# EAGLE board ir (EAGLE 9.4.2)
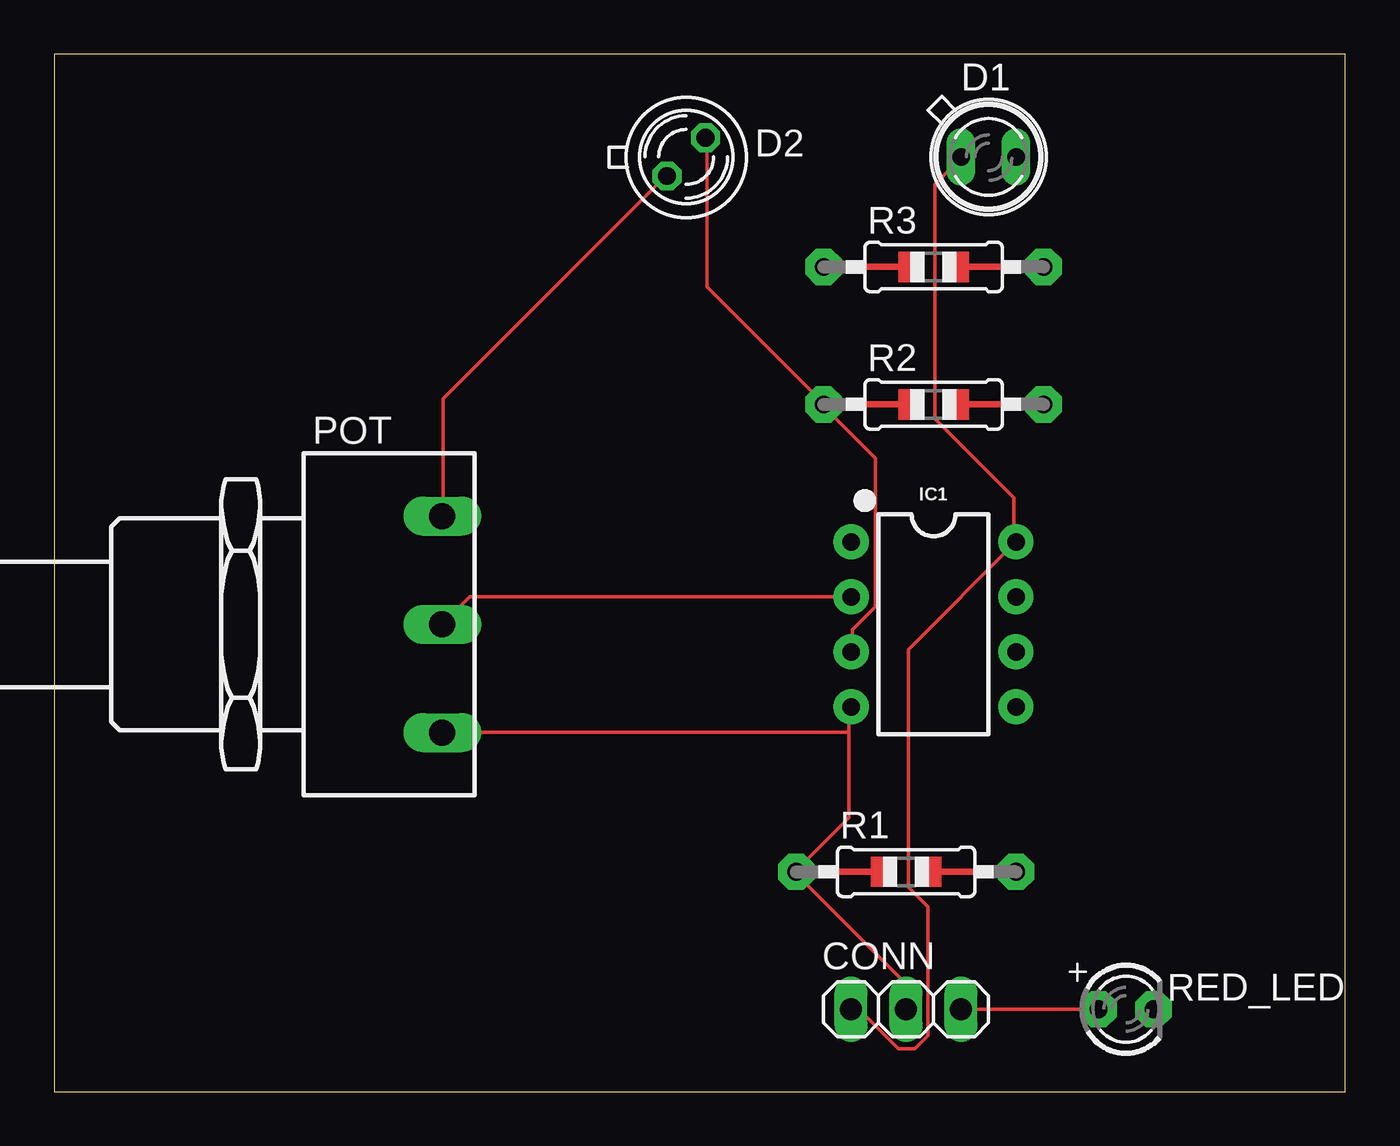
[diagram p0: board, top side]
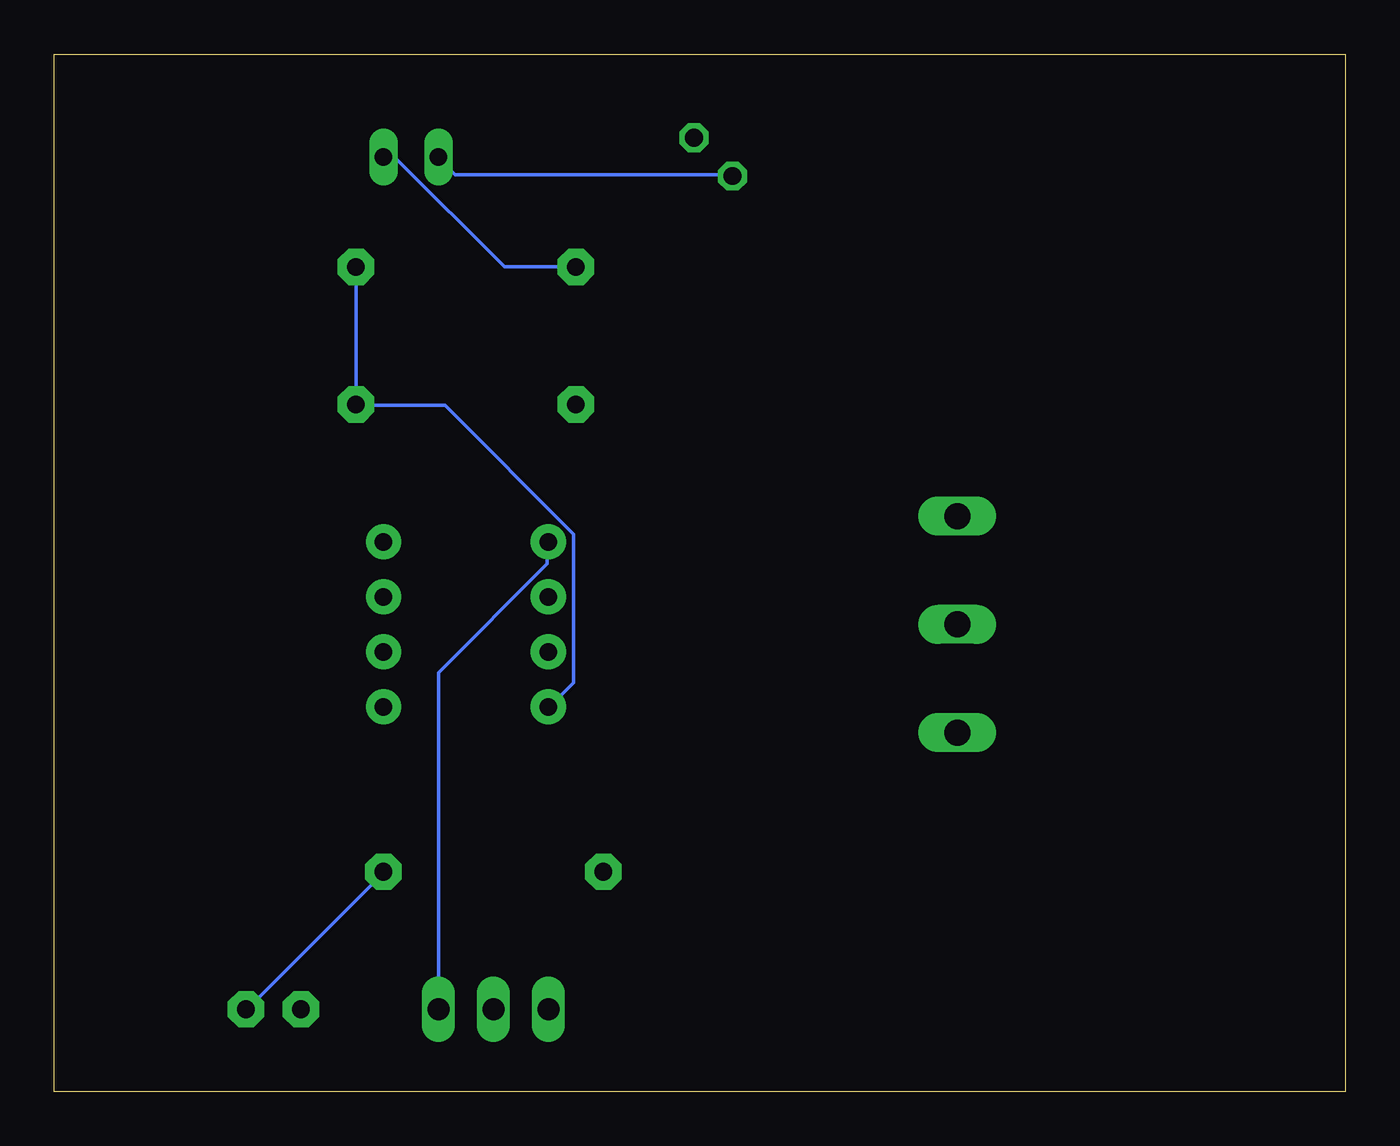
[diagram p1: board, bottom side, seen from below]

Size 59.67 x 47.93 mm. Coordinates in mm from the lower left corner, seen from the top.
Outline: 0,0 59.67,0 59.67,47.93 0,47.93 0,0
Copper layers (1*16): Top 0.035mm / dielectric 1.5mm / Bottom 0.035mm
Design rules "default": minimum track width 6mil, minimum drill 0.35mm, track to track 6mil, track to pad 6mil, pad to pad 6mil, via to via 6mil, smd to smd 6mil, copper to edge 40mil, drill to drill 6mil, minimum pad ring 10mil, minimum via ring 8mil, stop-mask expansion 4mil, vias tented up to drill 0mil, thermal gap 10mil

## Footprints (pad centres in the part's own frame; a part is rotated, then mirrored left to right if it is on the bottom)
1X03 = drill 1.016 long: 1 -2.54,0; 2 0,0; 3 2.54,0
SFH482 = drill 0.813 long: A -1.27,0; K 1.27,0
BPX65 = drill 0.813 octagon: A -0.889,-0.889; K 0.889,0.889
DIP08 = drill 0.813 pad 1.626: 1 -3.81,-3.81; 2 -1.27,-3.81; 3 1.27,-3.81; 4 3.81,-3.81; 5 3.81,3.81; 6 1.27,3.81; 7 -1.27,3.81; 8 -3.81,3.81
PC16S = drill 1.2 long: 1A -5,6.5; 1E 5,6.5; 1S 0,6.5
0805-THM = drill 0.813 pad 1.676 octagon: 1 -5.08,0; 2 5.08,0
LED3MM = drill 0.813 pad 1.676 octagon: A -1.27,0; K 1.27,0

## Placement (x,y rotation side)
CONN  [1X03]  39.37,3.81 0 top
D1  SFH482  [SFH482]  43.18,43.18 0 top
D2  BPX65  [BPX65]  29.21,43.18 0 top
IC1  OP-AMP  [DIP08]  40.64,21.59 270 top
POT  PC16S  [PC16S]  11.43,21.59 270 top
R1  1K  [0805-THM]  39.37,10.16 0 top
R2  10K  [0805-THM]  40.64,31.75 0 top
R3  100  [0805-THM]  40.64,38.1 0 top
RED_LED  [LED3MM]  49.53,3.81 0 top

## Library data of the parts
CONN = pinhead
D1 = led
D2 = opto-trans-siemens; MPN: BPX65.; OC_FARNELL: 327451; OC_NEWARK: 06WX2764
IC1 = SparkFun-IC-Amplifiers; PROD_ID: NA-XXXXX
POT = piher; OC_FARNELL: 4452940; OC_NEWARK: unknown
R1-R3 RED_LED = adafruit

## Nets
GND: CONN.2 IC1.4 POT.1E R1.1 R2.2 R3.2
N$1: R1.2 RED_LED.K
N$3: D1.K R3.1
O/P: CONN.3 IC1.1 RED_LED.A
PHOTODIO_NEG: D2.K IC1.3 R2.1
POT_3: IC1.2 POT.1S
VCC: CONN.1 D1.A D2.A IC1.8 POT.1A

## Tracks (layer width: path | path; a pad name or v marks a point on that pad's centre or on a via)
GND
  Top 0.152: CONN.2 39.32,3.81 39.32,5.03 34.29,10.06 R1.1 34.29,10.21 36.73,12.65 36.73,16.61 | 36.73,16.61 36.73,17.68 IC1.4 | 36.73,16.61 17.98,16.61 POT.1E
  Bottom 0.152: R3.2 R2.2 45.72,31.7 41.6,31.7 35.66,25.76 35.66,18.9 36.73,17.83 IC1.4
N$1
  Bottom 0.152: RED_LED.K 50.75,3.81 44.5,10.06 R1.2
N$3
  Bottom 0.152: R3.1 38.86,38.1 43.89,43.13 44.35,43.13 D1.K
O/P
  Top 0.152: RED_LED.A CONN.3
  Bottom 0.152: CONN.3 41.91,19.35 36.88,24.38 36.88,25.3 IC1.1
PHOTODIO_NEG
  Top 0.152: D2.K 30.18,44.04 30.18,37.19 35.51,31.85 R2.1 35.51,31.7 37.95,29.26 37.95,22.4 36.88,21.34 36.88,20.42 IC1.3
POT_3
  Top 0.152: IC1.2 19.2,22.86 17.98,21.64 POT.1S
VCC
  Top 0.152: CONN.1 37.19,3.81 39.01,1.98 39.78,1.98 40.39,2.59 40.39,8.53 39.47,9.45 39.47,20.42 IC1.8 44.35,25.45 44.35,27.43 40.69,31.09 40.69,41.91 41.91,43.13 D1.A | POT.1A 17.98,26.67 17.98,32 28.19,42.22 D2.A
  Bottom 0.152: D2.A 28.35,42.37 41.15,42.37 41.91,43.13 D1.A